# EAGLE board CT_schematic (EAGLE 7.6.0)

Size 100 x 80 mm. Coordinates in mm from the lower left corner, seen from the top.
Outline: 0,0 100,0 100,80 0,80 0,0
Copper layers (1*16): Top 0.035mm / dielectric 1.5mm / Bottom 0.035mm
Design rules "default": minimum track width 10mil, minimum drill 24mil, track to track 8mil, track to pad 8mil, pad to pad 8mil, via to via 8mil, smd to smd 8mil, copper to edge 40mil, drill to drill 8mil, minimum pad ring 10mil, minimum via ring 8mil, stop-mask expansion 4mil, vias tented up to drill 0mil, thermal gap 10mil

## Footprints (pad centres in the part's own frame; a part is rotated, then mirrored left to right if it is on the bottom)
C0603 = smd 0.8 x 0.8: 1 -0.762,0; 2 0.762,0
C0402 = smd 0.5 x 0.5: 1 -0.508,0; 2 0.508,0
C0805 = smd 1.2 x 1.3: 1 -1.016,0; 2 1.016,0
C1210 = smd 1.2 x 2.5: 1 -1.524,0; 2 1.524,0
EXV-9H = smd 3.505 x 1.676: 1 -2.857,0; 2 2.857,0
L0603 = smd 0.8 x 0.8: 1 -0.762,0; 2 0.762,0
R0603 = smd 0.8 x 0.8: 1 -0.762,0; 2 0.762,0
L1210 = smd 1.2 x 2.5: 1 -1.524,0; 2 1.524,0
DR1040 = smd 1.6 x 3.2: 1 -4.458,0; 2 4.458,0
PJ-037B_PACKAGE = drill 3.7 square: 1 12,0 | drill 3.2 square: 2 6,0
LFBGA100 = smd 0.52 x 0.52: A1 -3.6,3.6; A2 -2.8,3.6; A3 -2,3.6; A4 -1.2,3.6; A5 -0.4,3.6; A6 0.4,3.6; A7 1.2,3.6; A8 2,3.6; A9 2.8,3.6; A10 3.6,3.6; B1 -3.6,2.8; B2 -2.8,2.8; B3 -2,2.8; B4 -1.2,2.8; B5 -0.4,2.8; B6 0.4,2.8; B7 1.2,2.8; B8 2,2.8; B9 2.8,2.8; B10 3.6,2.8; C1 -3.6,2; C2 -2.8,2; C3 -2,2; C4 -1.2,2; C5 -0.4,2; C6 0.4,2; C7 1.2,2; C8 2,2; C9 2.8,2; C10 3.6,2; D1 -3.6,1.2; D2 -2.8,1.2; D3 -2,1.2; D4 -1.2,1.2; D5 -0.4,1.2; D6 0.4,1.2; D7 1.2,1.2; D8 2,1.2; D9 2.8,1.2; D10 3.6,1.2; E1 -3.6,0.4; E2 -2.8,0.4; E3 -2,0.4; E4 -1.2,0.4; E5 -0.4,0.4; E6 0.4,0.4; E7 1.2,0.4; E8 2,0.4; E9 2.8,0.4; E10 3.6,0.4; F1 -3.6,-0.4; F2 -2.8,-0.4; F3 -2,-0.4; F4 -1.2,-0.4; F5 -0.4,-0.4; F6 0.4,-0.4; F7 1.2,-0.4; F8 2,-0.4; F9 2.8,-0.4; F10 3.6,-0.4; G1 -3.6,-1.2; G2 -2.8,-1.2; G3 -2,-1.2; G4 -1.2,-1.2; G5 -0.4,-1.2; G6 0.4,-1.2; G7 1.2,-1.2; G8 2,-1.2; G9 2.8,-1.2; G10 3.6,-1.2; H1 -3.6,-2; H2 -2.8,-2; H3 -2,-2; H4 -1.2,-2; H5 -0.4,-2; H6 0.4,-2; H7 1.2,-2; H8 2,-2; H9 2.8,-2; H10 3.6,-2; J1 -3.6,-2.8; J2 -2.8,-2.8; J3 -2,-2.8; J4 -1.2,-2.8; J5 -0.4,-2.8; J6 0.4,-2.8; J7 1.2,-2.8; J8 2,-2.8; J9 2.8,-2.8; J10 3.6,-2.8; K1 -3.6,-3.6; K2 -2.8,-3.6; K3 -2,-3.6; K4 -1.2,-3.6; K5 -0.4,-3.6; K6 0.4,-3.6; K7 1.2,-3.6; K8 2,-3.6; K9 2.8,-3.6; K10 3.6,-3.6
A2200-A = smd 1.5 x 0.8: 1 -4.85,6.35; 2 -4.85,5.08; 3 -4.85,3.81; 4 -4.85,2.54; 5 -4.85,1.27; 6 -4.85,0; 7 -4.85,-1.27; 8 -4.85,-2.54; 9 -4.85,-3.81; 10 -4.85,-5.08; 11 -4.85,-6.35; 12 4.85,-6.35; 13 4.85,-5.08; 14 4.85,-3.81; 15 4.85,-2.54; 16 4.85,-1.27; 17 4.85,0; 18 4.85,1.27; 19 4.85,2.54; 20 4.85,3.81; 21 4.85,5.08; 22 4.85,6.35 | smd 1.2 x 1.2: 23 -2,2; 24 -2,0; 25 -2,-2; 26 0,-2; 27 0,0; 28 0,2; 29 2,2; 30 2,0; 31 2,-2
COAXIAL_C = smd 1 x 1: 1 0,-1.5; 2 0,1.5 | smd 1.05 x 2.2: 3 -1.475,0; 4 1.475,0
SOIC-8 = smd 1.6 x 0.6: 1 -2.7,1.905 | smd 1.55 x 0.6: 2 -2.7,0.635; 3 -2.7,-0.635; 4 -2.7,-1.905; 5 2.7,-1.905; 6 2.7,-0.635; 7 2.7,0.635; 8 2.7,1.905
SSOP-20 = smd 1.651 x 0.432: 1 -3.48,2.925; 2 -3.48,2.275; 3 -3.48,1.625; 4 -3.48,0.975; 5 -3.48,0.325; 6 -3.48,-0.325; 7 -3.48,-0.975; 8 -3.48,-1.625; 9 -3.48,-2.275; 10 -3.48,-2.925; 11 3.48,-2.925; 12 3.48,-2.275; 13 3.48,-1.625; 14 3.48,-0.975; 15 3.48,-0.325; 16 3.48,0.325; 17 3.48,0.975; 18 3.48,1.625; 19 3.48,2.275; 20 3.48,2.925
182-009-MALE = drill 1.194 pad 1.524 octagon: 1 -5.537,10.923; 2 -2.769,10.923; 3 0,10.923; 4 2.769,10.923; 5 5.537,10.923; 6 -4.153,8.08; 7 -1.384,8.08; 8 1.384,8.08; 9 4.153,8.08 | hole 3.048: -12.446,9.501; 12.446,9.501
RTL8201FL-VB-CG = smd 0.27 x 1: 1 0,0; 2 0.5,0; 3 1,0; 4 1.5,0; 5 2,0; 6 2.5,0; 7 3,0; 8 3.5,0; 9 4,0; 10 4.5,0; 11 5,0; 12 5.5,0; 25 5.5,8; 26 5,8; 27 4.5,8; 28 4,8; 29 3.5,8; 30 3,8; 31 2.5,8; 32 2,8; 33 1.5,8; 34 1,8; 35 0.5,8; 36 0,8 | smd 1 x 0.27: 13 6.75,1.25; 14 6.75,1.75; 15 6.75,2.25; 16 6.75,2.75; 17 6.75,3.25; 18 6.75,3.75; 19 6.75,4.25; 20 6.75,4.75; 21 6.75,5.25; 22 6.75,5.75; 23 6.75,6.25; 24 6.75,6.75; 37 -1.25,6.75; 38 -1.25,6.25; 39 -1.25,5.75; 40 -1.25,5.25; 41 -1.25,4.75; 42 -1.25,4.25; 43 -1.25,3.75; 44 -1.25,3.25; 45 -1.25,2.75; 46 -1.25,2.25; 47 -1.25,1.75; 48 -1.25,1.25
7498011122R = smd 0.71 x 2.29: 1 -3.545,-3.18; 2 -2.525,-3.18; 3 -1.505,-3.18; 4 -0.485,-3.18; 5 0.535,-3.18; 6 1.555,-3.18; 8 3.595,-3.18; 9 5.635,-3.18; 10 6.655,-3.18; 11 -6.605,-3.18; 12 -5.585,-3.18 | smd 1.4 x 2.54: 13 -8.51,10.2; 14 8.51,10.2 | hole 1.4: -3.5,0; 3.5,0
ABS07-32.768KHZ-7-T = smd 1.1 x 2.4: 1 -2.5,0; 2 0,0
ASFL1 = smd 1.7 x 1.5: 1 -1.27,-1.1; 2 1.27,-1.1; 3 1.27,1.1; 4 -1.27,1.1
IDT74FCT38072 = smd 0.51 x 1: 1 0,0; 2 1.27,0; 3 2.54,0; 4 3.81,0; 5 3.81,4.95; 6 2.54,4.95; 7 1.27,4.95; 8 0,4.95
HTSSOP14 = smd 1.676 x 0.356: 1 -2.8,1.95; 2 -2.8,1.3; 3 -2.8,0.65; 4 -2.8,0; 5 -2.8,-0.65; 6 -2.8,-1.3; 7 -2.8,-1.95; 8 2.8,-1.95; 9 2.8,-1.3; 10 2.8,-0.65; 11 2.8,0; 12 2.8,0.65; 13 2.8,1.3; 14 2.8,1.95 | smd 3 x 5: 15 0,0 | drill 0.4 pad 0.45: P$1 -0.75,1.5; P$2 0.75,1.5; P$3 -0.75,0; P$4 0.8,0; P$5 -0.75,-1.5; P$6 0.9,-1.5
WSON-8 = smd 0.3 x 0.6: 1 -0.75,0; 2 0.05,0; 3 0.85,0; 4 1.65,0; 5 1.65,3.8; 6 0.85,3.8; 7 0.05,3.8; 8 -0.75,3.8 | smd 3 x 2.6: PAD 0.45,1.9
SON-6 = smd 0.55 x 0.3: 1 -0.355,0.5 | smd 0.52 x 0.3: 2 -0.37,0; 3 -0.37,-0.5; 4 0.37,-0.5; 5 0.37,0; 6 0.37,0.5
SW_4-1437565-2 = smd 1.4 x 2.1: 1 -2.23,4.55; 2 -2.23,-4.55; 3 2.23,4.55; 4 2.23,-4.55
LGM67K-G1J2-24-Z = smd 0.8 x 1.4: A -2,0; C 0,0
NC7SZ125M5X = smd 1.3 x 0.7: 1 -1.3,0.95; 2 -1.3,0; 3 -1.3,-0.95; 4 1.3,-0.95; 5 1.3,0.95

## Placement (x,y rotation side)
C1  1e-06  [C0603]  -33.02,95.25 0 top  (outside the outline)
C2  1e-07  [C0603]  -36.83,95.25 0 top  (outside the outline)
C3  1e-07  [C0603]  -40.64,95.25 0 top  (outside the outline)
C4  1e-07  [C0603]  -44.45,95.25 0 top  (outside the outline)
C5  1e-07  [C0603]  -48.26,95.25 0 top  (outside the outline)
C6  1e-07  [C0603]  -52.07,95.25 0 top  (outside the outline)
C7  1e-07  [C0603]  -55.88,95.25 0 top  (outside the outline)
C8  4.7e-06  [C0603]  -29.21,95.25 0 top  (outside the outline)
C9  1e-08  [C0603]  -59.69,95.25 0 top  (outside the outline)
C10  1e-06  [C0603]  -63.5,95.25 0 top  (outside the outline)
C11  1e-11  [C0402]  -88.9,100.33 0 top  (outside the outline)
C12  1e-11  [C0402]  -92.71,100.33 0 top  (outside the outline)
C13  1e-07  [C0402]  -15.24,105.41 0 top  (outside the outline)
C14  1e-08  [C0402]  -19.05,105.41 0 top  (outside the outline)
C15  1e-06  [C0603]  -67.31,95.25 0 top  (outside the outline)
C16  1e-06  [C0603]  -71.12,95.25 0 top  (outside the outline)
C17  1e-06  [C0603]  -74.93,95.25 0 top  (outside the outline)
C18  4.7e-06  [C0805]  -59.69,85.09 0 top  (outside the outline)
C19  1e-06  [C0603]  -78.74,95.25 0 top  (outside the outline)
C20  1e-06  [C0603]  -82.55,95.25 0 top  (outside the outline)
C21  2.2e-08  [C0402]  -81.28,100.33 0 top  (outside the outline)
C22  1e-06  [C0603]  -86.36,95.25 0 top  (outside the outline)
C23  1e-07  [C0402]  -22.86,105.41 0 top  (outside the outline)
C24  1e-08  [C0402]  -26.67,105.41 0 top  (outside the outline)
C25  1e-06  [C0603]  -90.17,95.25 0 top  (outside the outline)
C26  1e-07  [C0402]  -30.48,105.41 0 top  (outside the outline)
C27  1e-08  [C0402]  -34.29,105.41 0 top  (outside the outline)
C28  1e-07  [C0402]  -38.1,105.41 0 top  (outside the outline)
C29  1e-07  [C0402]  -41.91,105.41 0 top  (outside the outline)
C30  1e-08  [C0402]  -45.72,105.41 0 top  (outside the outline)
C31  1e-08  [C0402]  -49.53,105.41 0 top  (outside the outline)
C32  1e-08  [C0402]  -53.34,105.41 0 top  (outside the outline)
C33  1e-06  [C0603]  -93.98,95.25 0 top  (outside the outline)
C34  3.3e-09  [C0402]  -85.09,100.33 0 top  (outside the outline)
C35  1e-07  [C0402]  -57.15,105.41 0 top  (outside the outline)
C36  2.2e-05  [C1210]  -16.51,85.09 0 top  (outside the outline)
C37  2.2e-05  [C1210]  -22.86,85.09 0 top  (outside the outline)
C38  1e-05  [C0805]  -64.77,85.09 0 top  (outside the outline)
C39  1e-05  [C0805]  -69.85,85.09 0 top  (outside the outline)
C40  1e-06  [C0603]  -15.24,100.33 0 top  (outside the outline)
C41  1e-05  [C1210]  -29.21,85.09 0 top  (outside the outline)
C42  1e-07  [C0402]  -60.96,105.41 0 top  (outside the outline)
C43  0.0001  [EXV-9H]  -35.56,77.47 0 top  (outside the outline)
C44  0.0001  [EXV-9H]  -46.99,77.47 0 top  (outside the outline)
C45  1e-08  [C0402]  -64.77,105.41 0 top  (outside the outline)
C46  1e-08  [C0402]  -68.58,105.41 0 top  (outside the outline)
C47  1e-08  [C0402]  -72.39,105.41 0 top  (outside the outline)
F1  240.0  [L0603]  -19.05,100.33 0 top  (outside the outline)
I1  97.0  [R0603]  -22.86,100.33 0 top  (outside the outline)
I5  1.5e-05  [L1210]  -35.56,85.09 0 top  (outside the outline)
I6  5.2e-06  [DR1040]  -54.61,55.88 0 top  (outside the outline)
J1  PJ-037B  [PJ-037B_PACKAGE]  -27.94,57.15 0 top  (outside the outline)
R2  1000.0  [R0603]  -26.67,100.33 0 top  (outside the outline)
R4  4700.0  [R0603]  -30.48,100.33 0 top  (outside the outline)
R5  4700.0  [R0603]  -34.29,100.33 0 top  (outside the outline)
R6  4700.0  [R0603]  -38.1,100.33 0 top  (outside the outline)
R7  2200.0  [R0603]  -41.91,100.33 0 top  (outside the outline)
R8  2200.0  [R0603]  -45.72,100.33 0 top  (outside the outline)
R11  10000.0  [R0603]  -40.64,90.17 0 top  (outside the outline)
R12  10000.0  [R0603]  -45.72,90.17 0 top  (outside the outline)
R13  10000.0  [R0603]  -50.8,90.17 0 top  (outside the outline)
R14  10000.0  [R0603]  -55.88,90.17 0 top  (outside the outline)
R15  10000.0  [R0603]  -60.96,90.17 0 top  (outside the outline)
R16  100000.0  [R0603]  -83.82,85.09 0 top  (outside the outline)
R17  100000.0  [R0603]  -88.9,85.09 0 top  (outside the outline)
R18  100000.0  [R0603]  -93.98,85.09 0 top  (outside the outline)
R19  120.0  [R0603]  -49.53,100.33 0 top  (outside the outline)
R20  0.1  [R0603]  -53.34,100.33 0 top  (outside the outline)
R21  0.1  [R0603]  -57.15,100.33 0 top  (outside the outline)
R22  200.0  [R0603]  -60.96,100.33 0 top  (outside the outline)
R23  200.0  [R0603]  -64.77,100.33 0 top  (outside the outline)
R24  2490.0  [R0603]  -68.58,100.33 0 top  (outside the outline)
R25  4700.0  [R0603]  -72.39,100.33 0 top  (outside the outline)
R26  10000.0  [R0603]  -66.04,90.17 0 top  (outside the outline)
R27  10000.0  [R0603]  -71.12,90.17 0 top  (outside the outline)
R28  10000.0  [R0603]  -76.2,90.17 0 top  (outside the outline)
R29  10000.0  [R0603]  -81.28,90.17 0 top  (outside the outline)
R30  10000.0  [R0603]  -86.36,90.17 0 top  (outside the outline)
R31  10000.0  [R0603]  -91.44,90.17 0 top  (outside the outline)
R32  71007.101651032  [R0603]  -78.74,85.09 0 top  (outside the outline)
R33  22000.0  [R0603]  -15.24,95.25 0 top  (outside the outline)
R34  100000.0  [R0603]  -15.24,90.17 0 top  (outside the outline)
R35  300000.0  [R0603]  -20.32,90.17 0 top  (outside the outline)
R36  100000.0  [R0603]  -25.4,90.17 0 top  (outside the outline)
R37  10000.0  [R0603]  -20.32,95.25 0 top  (outside the outline)
R38  10000.0  [R0603]  -25.4,95.25 0 top  (outside the outline)
R39  9100.0  [R0603]  -76.2,100.33 0 top  (outside the outline)
R40  680000.0  [R0603]  -30.48,90.17 0 top  (outside the outline)
R41  120000.0  [R0603]  -35.56,90.17 0 top  (outside the outline)
U1  stm32f107vch6  [LFBGA100]  -74.93,35.56 0 top  (outside the outline)
U2  A2200-A  [A2200-A]  -58.42,38.1 0 top  (outside the outline)
U3  73412-0114  [COAXIAL_C]  -82.55,68.58 0 top  (outside the outline)
U4  AT25040B-SSHL-T  [SOIC-8]  -72.39,55.88 0 top  (outside the outline)
U5  MAX3218EAP+T  [SSOP-20]  -17.78,68.58 0 top  (outside the outline)
U6  182-009-113R531  [182-009-MALE]  -55.88,6.35 0 top  (outside the outline)
U7  MCP2562-E/SN  [SOIC-8]  -86.36,55.88 0 top  (outside the outline)
U8  182-009-113R531  [182-009-MALE]  -36.83,34.29 0 top  (outside the outline)
U9  RTL8201FL-VB-CG  [RTL8201FL-VB-CG]  -95.25,31.75 0 top  (outside the outline)
U10  7498011122R  [7498011122R]  -22.86,7.62 0 top  (outside the outline)
U11  ABS07-32.768KHZ-7-T  [ABS07-32.768KHZ-7-T]  -68.58,77.47 0 top  (outside the outline)
U12  ASFL1-25MHZ-NCS  [ASFL1]  -54.61,68.58 0 top  (outside the outline)
U13  ASFL1-50MHZ-NCS  [ASFL1]  -71.12,68.58 0 top  (outside the outline)
U14  idt74fct38072  [IDT74FCT38072]  -29.21,74.93 0 top  (outside the outline)
U15  tps54225PWP  [HTSSOP14]  -77.47,77.47 0 top  (outside the outline)
U16  LP2951ACSDX/NOPB  [WSON-8]  -38.1,67.31 0 top  (outside the outline)
U17  TPS3895ADRYR  [SON-6]  -74.93,104.14 0 top  (outside the outline)
U18  4-1437565-2  [SW_4-1437565-2]  -44.45,55.88 0 top  (outside the outline)
U19  Q65110A2395  [LGM67K-G1J2-24-Z]  -86.36,77.47 0 top  (outside the outline)
U20  nc7sz125m5x  [NC7SZ125M5X]  -40.64,83.82 0 top  (outside the outline)
U21  nc7sz125m5x  [NC7SZ125M5X]  -46.99,83.82 0 top  (outside the outline)
U22  nc7sz125m5x  [NC7SZ125M5X]  -53.34,83.82 0 top  (outside the outline)

## Library data of the parts
C1-C47 F1 I1 I5 I6 J1 R2 R4-R8 R11-R41 U1-U22 = circuit_tree

## Nets
CLK_CRYSTAL_U1_A1: C11.1 U1.A1 U11.1
CLK_CRYSTAL_U1_B1: C12.1 U1.B1 U11.2
CLK_U1_C1: U1.C1 U12.3
CLK_U1_H2: U1.H2 U14.7
CLK_U9_43: U9.43 U14.6
CLK_U14_3: U13.3 U14.3
GND: C1.2 C2.2 C3.2 C4.2 C5.2 C6.2 C7.2 C8.2 C9.2 C10.2 C11.2 C12.2 C13.2 C14.2 C15.2 C16.2 C17.2 C19.2 C20.2 C21.2 C22.2 C23.2 C24.2 C25.2 C26.2 C27.2 C28.2 C29.2 C30.2 C31.2 C32.2 C33.2 C34.2 C36.2 C37.2 C38.2 C39.2 C40.2 C41.2 C42.2 C43.2 C44.2 C45.2 C46.2 C47.2 J1.2 R2.2 R11.2 R20.2 R21.2 R24.2 R29.2 R33.2 R36.2 R39.2 R41.2 U1.C2 U1.E4 U1.E5 U1.E6 U1.E7 U1.G1 U1.H1 U2.7 U2.8 U2.23 U2.24 U2.25 U2.26 U2.27 U2.28 U2.29 U2.30 U2.31 U4.4 U5.5 U5.17 U5.20 U6.5 U7.2 U7.8 U8.5 U9.7 U9.20 U9.33 U9.42 U9.47 U12.2 U13.2 U14.4 U14.5 U14.8 U15.5 U15.8 U15.9 U15.15 U16.3 U16.4 U16.PAD U17.2 U19.C U20.1 U20.3 U21.1 U21.3 U22.1 U22.3
NET_U1_A5: R8.1 U1.A5 U2.16
NET_U1_B4: R7.1 U1.B4 U2.15
NET_U1_D5: R11.1 U1.D5
NET_U1_E1: R6.1 U1.E1 U22.4
NET_U1_F2: U9.30
NET_U1_J2: U9.31
NET_U1_K1: C9.1 C10.1 F1.1 U1.J1 U1.K1
NET_U1_K9: U19.A
NET_U1_K10: U18.3 U18.4
NET_U2_2: R12.2 U2.2
NET_U2_6: U2.6
NET_U2_17: R12.1 U2.17
NET_U2_19: U2.19
NET_U2_22: R5.1 U2.22 U21.4
NET_U3_1: U2.11 U3.1
NET_U3_2: U2.10 U3.2 U3.3 U3.4
NET_U4_3: R13.1 U4.3
NET_U4_7: R15.1 U4.7
NET_U5_1: I5.1 U5.1
NET_U5_2: R16.1 U5.2
NET_U5_3: R17.1 U5.3
NET_U5_4: R18.1 U5.4
NET_U5_15: C17.1 U5.15
NET_U5_16: C18.2 U5.16
NET_U5_18: C18.1 U5.18
NET_U5_19: C16.1 U5.19
NET_U6_2: U5.12 U6.2
NET_U6_3: U5.14 U6.3
NET_U6_7: U5.11 U6.7
NET_U6_8: U5.13 U6.8
NET_U7_6: R19.2 U7.6
NET_U8_2: R19.2 U7.6 U8.2
NET_U8_3: R19.1 U7.7 U8.3
NET_U9_6: C22.1 C23.1 C24.1 I1.1 U9.6 U9.41
NET_U9_10: R29.1 U9.10
NET_U9_13: R26.1 U9.13
NET_U9_18: R30.1 U9.18
NET_U9_28: U9.28
NET_U9_29: R4.1 U9.29 U20.4
NET_U9_32: R25.1 U9.32
NET_U9_34: R27.1 U9.34
NET_U9_35: R28.1 U9.35
NET_U9_39: R31.1 U9.39
NET_U9_40: C29.1 U9.40
NET_U9_46: R24.1 U9.46
NET_U9_48: C28.1 U9.48
NET_U10_1: U9.1 U10.1
NET_U10_3: U9.2 U10.3
NET_U10_4: U9.4 U10.4
NET_U10_5: C21.1 U10.2 U10.5
NET_U10_6: U9.5 U10.6
NET_U10_8: R21.1 U10.8
NET_U10_10: R22.1 U10.10
NET_U10_12: R23.1 U10.12
NET_U10_13: R20.1 U10.13 U10.14
NET_U10_34: R22.2
NET_U10_35: R23.2
NET_U15_2: R32.2 R33.1 U15.2
NET_U15_3: C33.1 U15.3
NET_U15_4: C34.1 U15.4
NET_U15_10: C35.1 I6.1 U15.10 U15.11
NET_U15_12: C35.2 U15.12
NET_U16_5: R34.1 U16.5
NET_U16_7: R35.2 R36.1 U16.7
NET_U17_1: R38.1 R39.1 U17.1
NET_U17_3: R40.2 R41.1 U17.3
NET_U17_4: R37.1 U17.4 U20.2 U21.2 U22.2
NET_U18_1: R2.1 U18.1 U18.2
PROC_CAN1_RX: U1.C10 U7.4
PROC_CAN1_TX: U1.A4 U7.1
PROC_ETH_CRS_DV: U9.36
PROC_ETH_RXD0: U9.14
PROC_ETH_RXD1: U9.16
PROC_ETH_TX_EN: U9.27
PROC_ETH_TXD0: U9.23
PROC_ETH_TXD1: U9.24
PROC_SPI1_MISO: U1.A6 U4.2
PROC_SPI1_MOSI: U1.C5 U4.5
PROC_SPI1_NSS: R14.1 U1.A8 U4.1
PROC_SPI1_SCK: U1.A7 U4.6
PROC_UART4_RX: U1.B8 U5.9
PROC_UART4_TX: U1.B9 U5.7
VCC_S1_6V4: C38.1 C39.1 C40.1 C43.1 C44.1 J1.1 U15.7 U15.13 U15.14 U16.8
VCC_TIER1_3V3: C1.1 C2.1 C3.1 C4.1 C5.1 C6.1 C7.1 C8.1 C13.1 C14.1 C15.1 C20.1 C25.1 C26.1 C27.1 C30.1 C31.1 C32.1 C36.1 C37.1 C42.1 C45.1 C46.1 C47.1 F1.2 I1.2 I5.2 I6.2 R4.2 R5.2 R6.2 R7.2 R8.2 R13.2 R14.2 R15.2 R16.2 R17.2 R18.2 R25.2 R26.2 R27.2 R28.2 R30.2 R31.2 R32.1 R37.2 R38.2 R40.1 U1.B2 U1.D2 U1.F4 U1.F5 U1.F6 U1.F7 U2.20 U4.8 U5.6 U7.5 U9.15 U9.21 U9.37 U10.9 U10.11 U12.4 U13.4 U14.1 U14.2 U15.1 U17.6 U20.5 U21.5 U22.5
VCC_TIER1_5V0: C19.1 C41.1 R34.2 R35.1 U7.3 U16.1

## Tracks (layer width: path | path; a pad name or v marks a point on that pad's centre or on a via)
CLK_CRYSTAL_U1_A1  (2 unrouted)
CLK_CRYSTAL_U1_B1  (2 unrouted)
CLK_U1_C1  (1 unrouted)
CLK_U1_H2  (1 unrouted)
CLK_U9_43  (1 unrouted)
CLK_U14_3  (1 unrouted)
GND  (106 unrouted)
NET_U1_A5  (2 unrouted)
NET_U1_B4  (2 unrouted)
NET_U1_D5  (1 unrouted)
NET_U1_E1  (2 unrouted)
NET_U1_K1  (4 unrouted)
NET_U1_K10  (1 unrouted)
NET_U2_2  (1 unrouted)
NET_U2_17  (1 unrouted)
NET_U2_22  (2 unrouted)
NET_U3_1  (1 unrouted)
NET_U3_2  (3 unrouted)
NET_U4_3  (1 unrouted)
NET_U4_7  (1 unrouted)
NET_U5_1  (1 unrouted)
NET_U5_2  (1 unrouted)
NET_U5_3  (1 unrouted)
NET_U5_4  (1 unrouted)
NET_U5_15  (1 unrouted)
NET_U5_16  (1 unrouted)
NET_U5_18  (1 unrouted)
NET_U5_19  (1 unrouted)
NET_U6_2  (1 unrouted)
NET_U6_3  (1 unrouted)
NET_U6_7  (1 unrouted)
NET_U6_8  (1 unrouted)
NET_U7_6  (1 unrouted)
NET_U8_2  (2 unrouted)
NET_U8_3  (2 unrouted)
NET_U9_6  (5 unrouted)
NET_U9_10  (1 unrouted)
NET_U9_13  (1 unrouted)
NET_U9_18  (1 unrouted)
NET_U9_29  (2 unrouted)
NET_U9_32  (1 unrouted)
NET_U9_34  (1 unrouted)
NET_U9_35  (1 unrouted)
NET_U9_39  (1 unrouted)
NET_U9_40  (1 unrouted)
NET_U9_46  (1 unrouted)
NET_U9_48  (1 unrouted)
NET_U10_1  (1 unrouted)
NET_U10_3  (1 unrouted)
NET_U10_4  (1 unrouted)
NET_U10_5  (2 unrouted)
NET_U10_6  (1 unrouted)
NET_U10_8  (1 unrouted)
NET_U10_10  (1 unrouted)
NET_U10_12  (1 unrouted)
NET_U10_13  (2 unrouted)
NET_U15_2  (2 unrouted)
NET_U15_3  (1 unrouted)
NET_U15_4  (1 unrouted)
NET_U15_10  (3 unrouted)
NET_U15_12  (1 unrouted)
NET_U16_5  (1 unrouted)
NET_U16_7  (2 unrouted)
NET_U17_1  (2 unrouted)
NET_U17_3  (2 unrouted)
NET_U17_4  (4 unrouted)
NET_U18_1  (2 unrouted)
PROC_CAN1_RX  (1 unrouted)
PROC_CAN1_TX  (1 unrouted)
PROC_SPI1_MISO  (1 unrouted)
PROC_SPI1_MOSI  (1 unrouted)
PROC_SPI1_NSS  (2 unrouted)
PROC_SPI1_SCK  (1 unrouted)
PROC_UART4_RX  (1 unrouted)
PROC_UART4_TX  (1 unrouted)
VCC_S1_6V4  (9 unrouted)
VCC_TIER1_3V3  (72 unrouted)
VCC_TIER1_5V0  (5 unrouted)